# Altium PCB Jinkono Module вер.0.0.PcbDoc (part 1 of 2)
Units mm, origin at the board's own origin, x right, y up, seen from the top; angles counter-clockwise.
Board outline 90 x 80 mm, 2 copper layers (Top Layer, Bottom Layer); 154 components, 381 nets, 2588 pads, 0 vias.
Unrouted connection lines stored in the file: 1285.
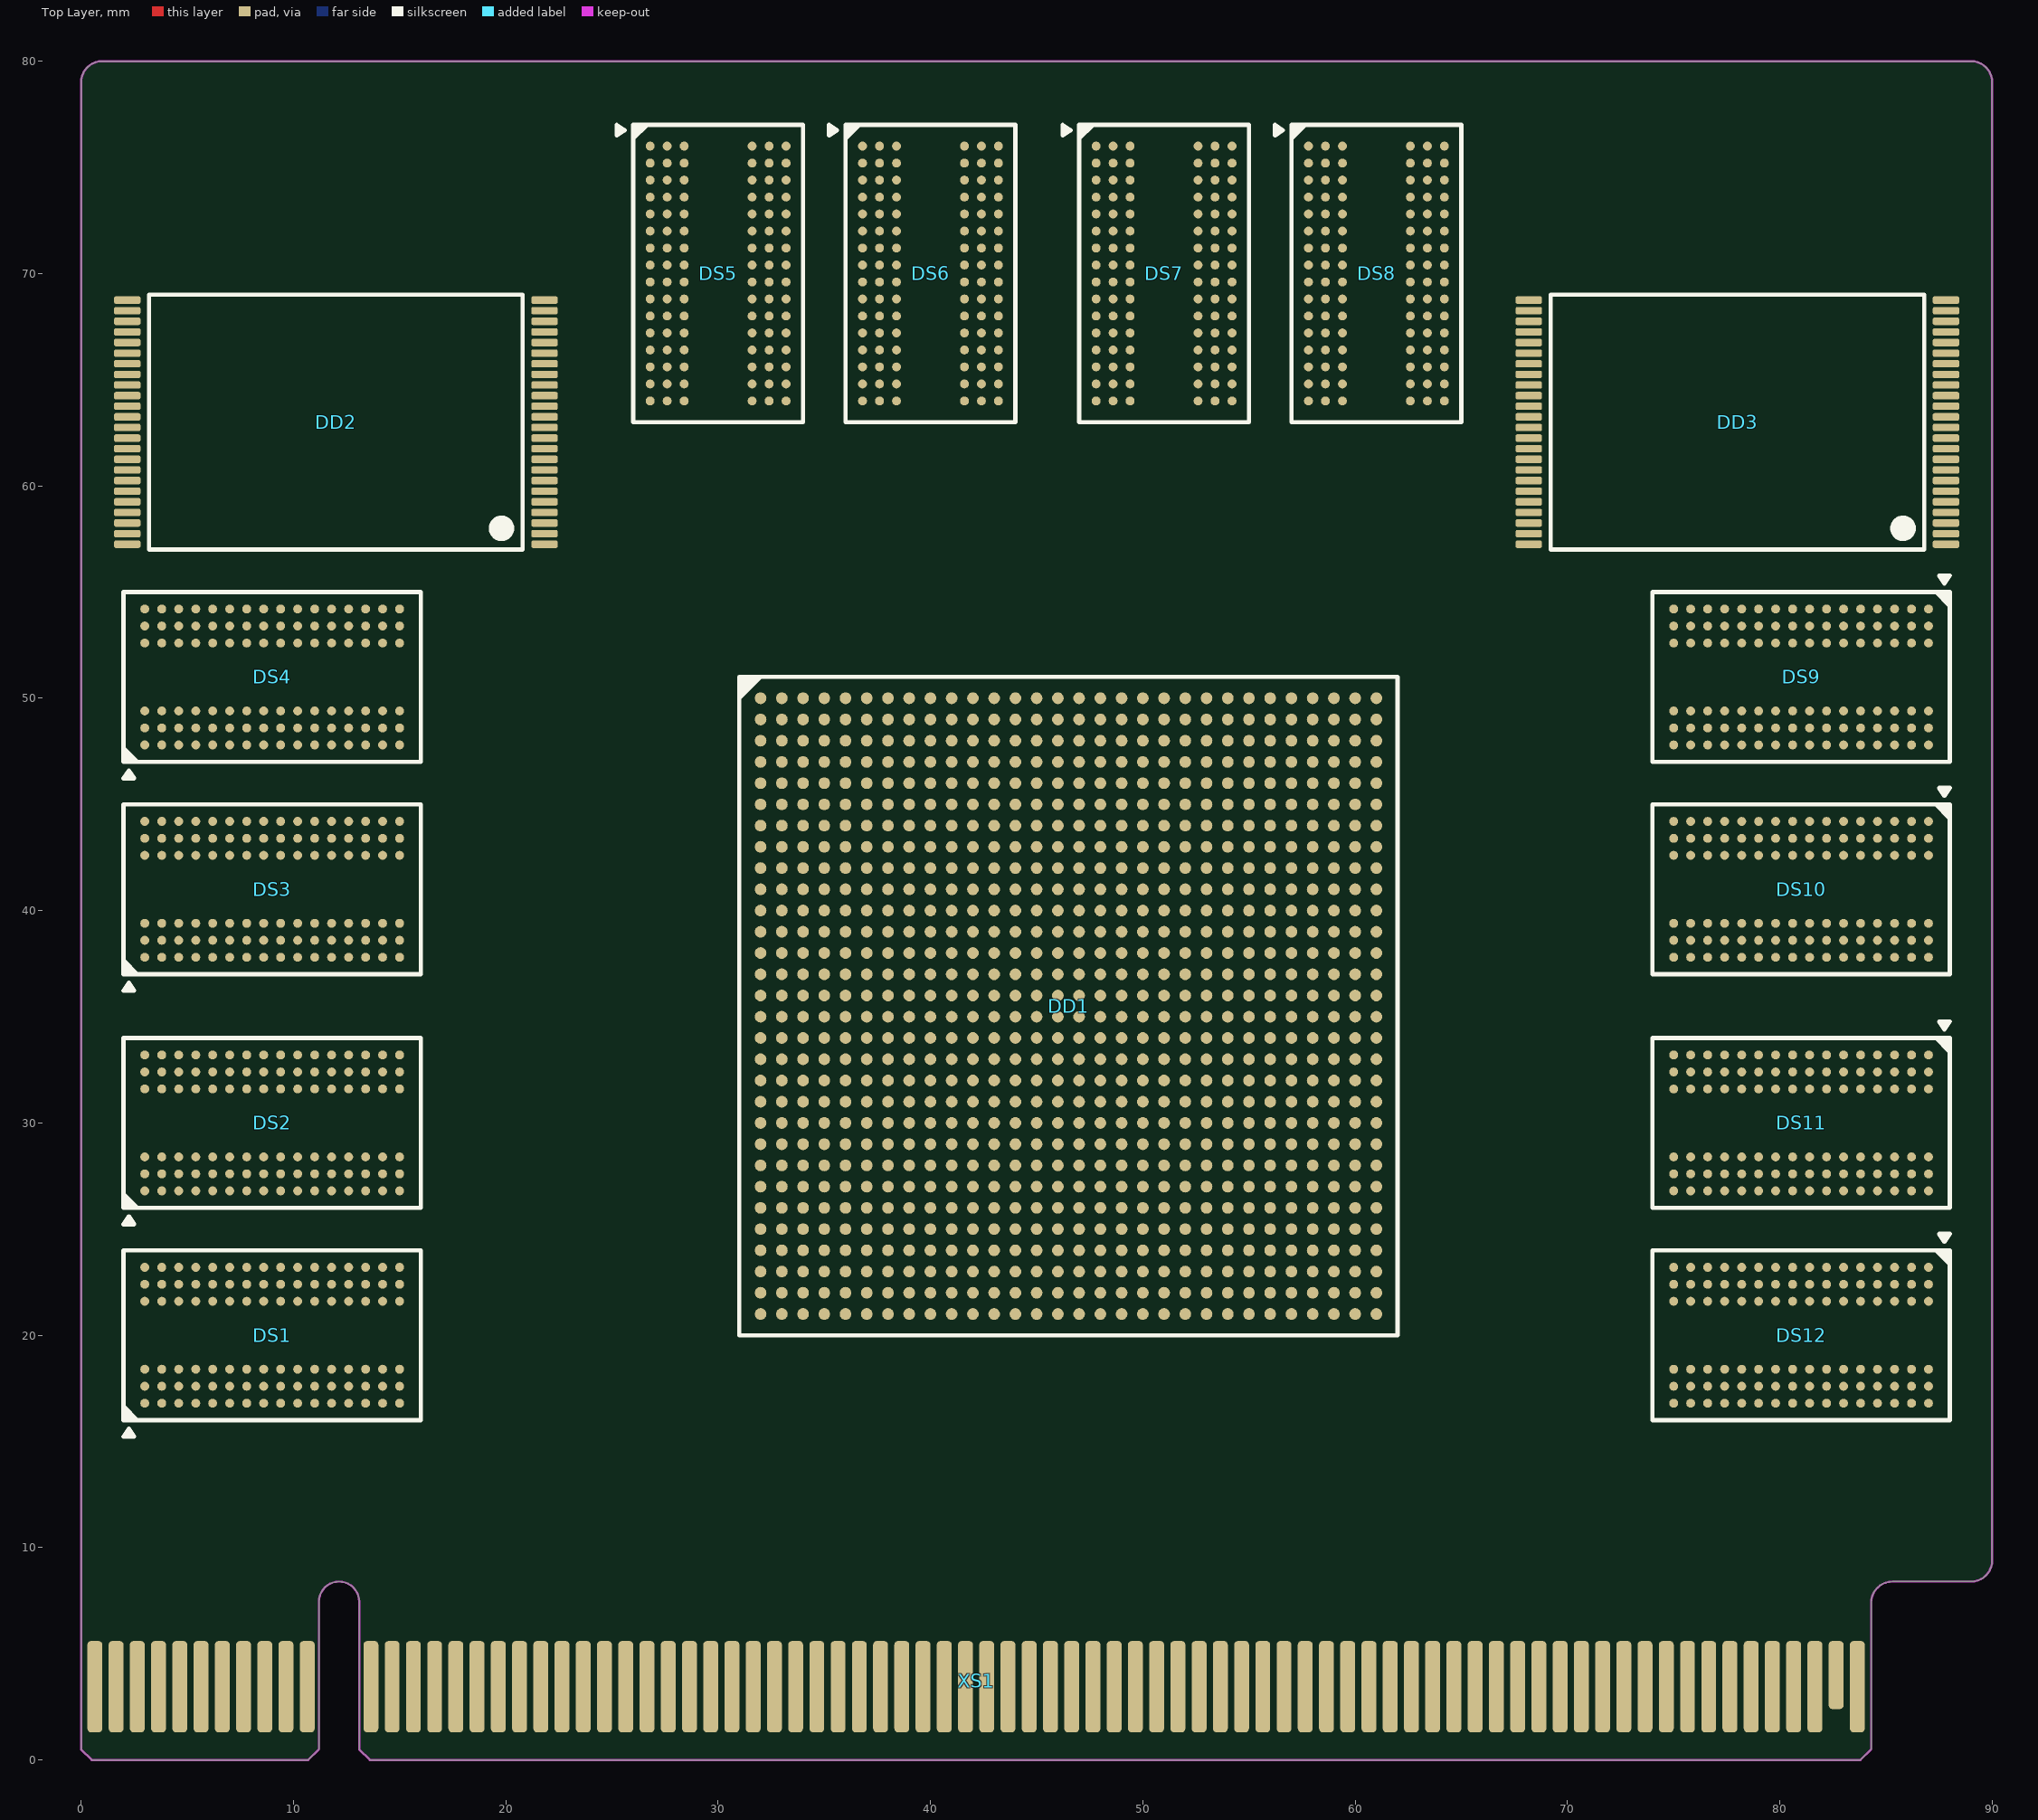
[diagram p0: Top Layer view]
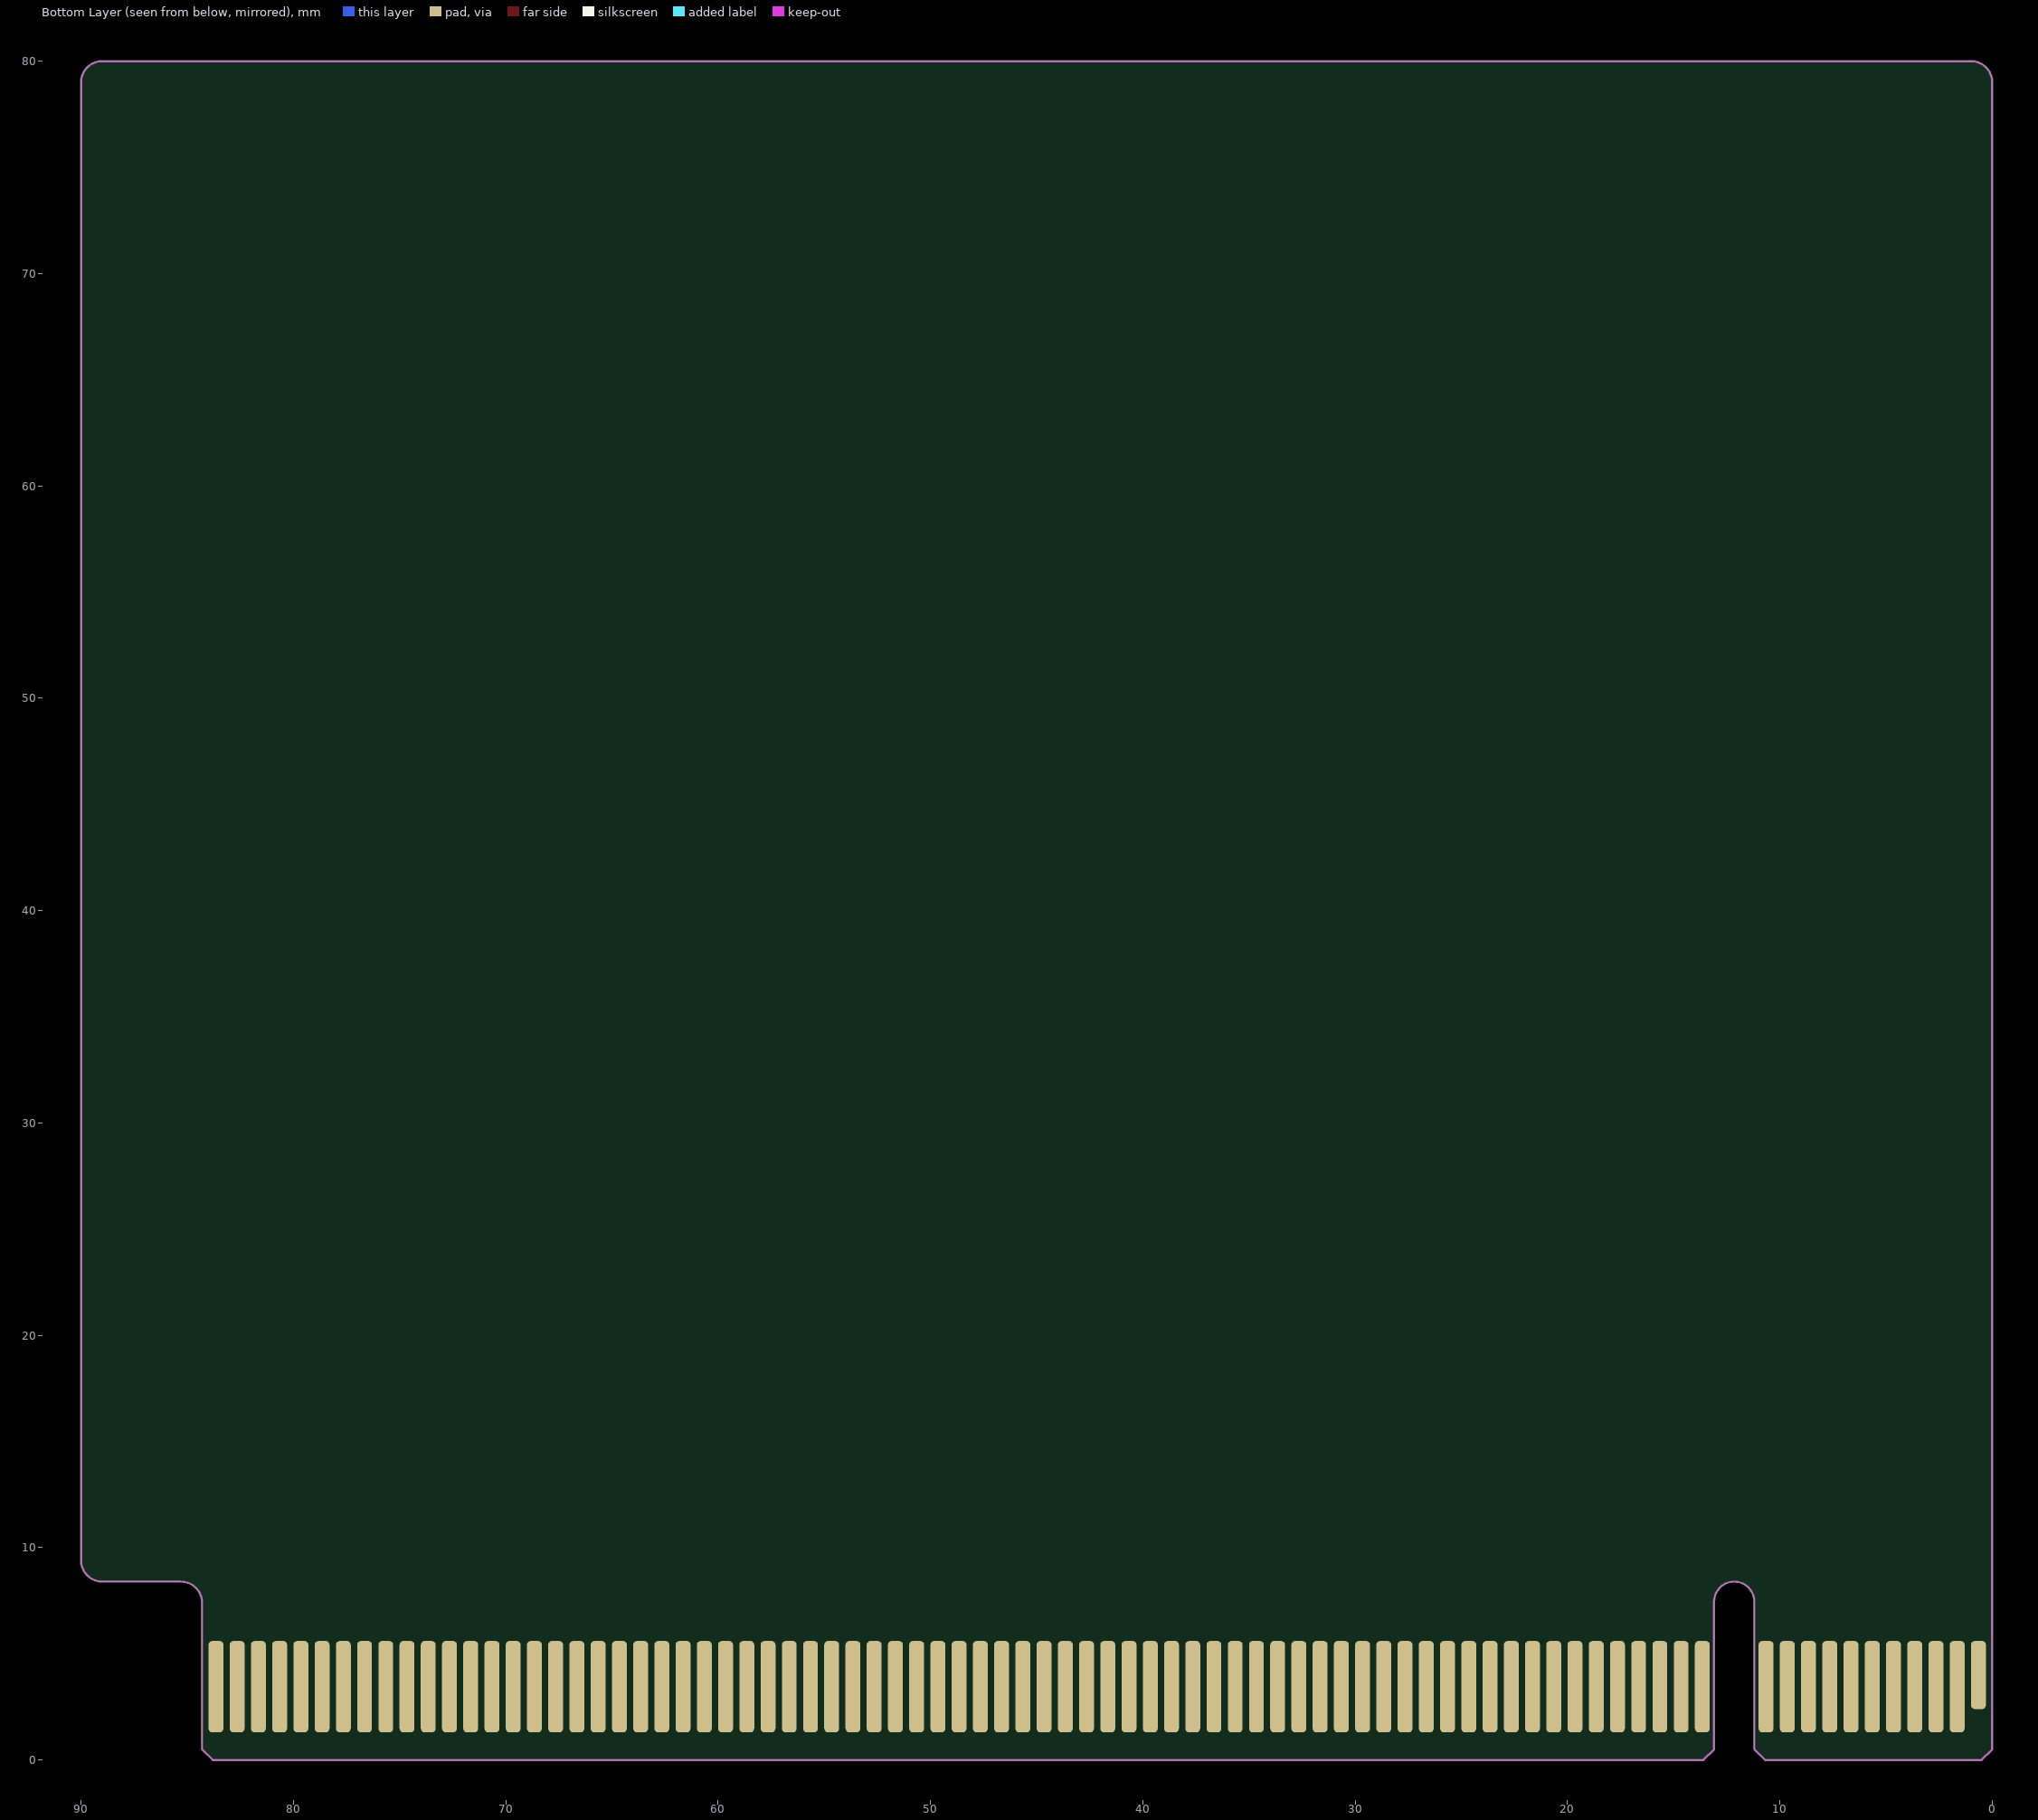
[diagram p1: Bottom Layer view, seen from below]

## Layer stack, top to bottom
Top Solder: solder mask 0.0102, Solder Resist, Dk 3.5
Top Layer: signal copper 0.0356
Dielectric 1: dielectric 0.32, FR-4, Dk 4.8
Bottom Layer: signal copper 0.0356
Bottom Solder: solder mask 0.0102, Solder Resist, Dk 3.5

## Board outline
0,0.5 0.5,0 10.7,0 11.2,0.5 11.2,7.45 cw(c12.15,7.45) 12.15,8.4 cw(c12.15,7.45) 13.1,7.45 13.1,0.5 13.6,0 83.8,0 84.3,0.5 84.3,7.4 cw(c85.3,7.4) 85.3,8.4 89,8.4 ccw(c89,9.4) 90,9.4 90,79 ccw(c89,79) 89,80 1,80 ccw(c1,79) 0,79

## Design rules (kind name [scope] priority, off if disabled: settings)
Clearance [All] p1: gap=0.254 ignorepadtopadclearanceinfootprint=FALSE except(0: Arc-Hole Track-Hole SMDPad-Hole THPad-Hole Via-Hole Fill-Hole Poly-Hole Region-Hole Text-Hole)
PolygonConnect [All] p1: connectstyle=Relief reliefconductorwidth=0.254 reliefentries=4 polygonreliefangle="90 Angle" airgapwidth=0.254
RoutingVias [All] p1: holewidth=0.711 width=1.27 viastyle="Through Hole" minholewidth=0.711 minwidth=1.27 maxholewidth=0.711 maxwidth=1.27
SolderMaskExpansion [All] p1: expansion=0.102 istentingtop=FALSE
Width [All] p1: maxlimit=0.254 minlimit=0.254 preferedwidth=0.254
30 further rules are at their usual default settings.

## Classes and differential pairs
component class Э3-12: DD2 DD3
component class Э3-11: C19 C20 C21 C22 C23 C24 C25 C26 C27 C28 C29 C30 C31 C32 C33 C34 C35 C36 C37 C38 C39 C40 C41 C42 C43 C44 C45 C46 C47 C48 C49 C50 C51 DA? R76 R77 R78 R79 R80 R81 R82 R83 R84 R85 R86 R87
component class Э3-10: C1 C2 C3 C4 C5 C6 C7 C8 C9 C10 C11 C12 C13 C14 C15 C16 C17 C18 R1 R2 R3 R4 R5 R6 R7 R8 R9 R10 R11 R12 R13 R14 R15 R16 R17 R18 R19 R20 R21 R22 R23 R24 R25 R26 R27 R28 R29 R30 R31 R32 R33 R34 R35 R36 R37 R38 R39 R40 R41 R42 R43 R44 R45 R46 R47 R48 R49 R50 R51 R52 R53 R54 R55 R56 R57 R58 R59 R60 R61 R62 R63 R64 R65 R66 R67 R68 R69 R70 R71 R72 R73 R74 R75
component class Э3-9: DS9 DS10 DS11 DS12
component class Э3-8: DS5 DS6 DS7 DS8
component class Э3-7: DS1 DS2 DS3 DS4
component class Э3-2: DD1
component class Э3-1: XS1

## Components (designator, comment, footprint, x,y, rotation, side; value= is the part's Value field where it differs from the comment)
C1 "1" C0201-B-0.3mm 735.001,187 r0 top value="0,1 мкФ"
C2 "1" C0201-B-0.3mm 672.001,187 r0 top value="0,1 мкФ"
C3 "1" C0201-B-0.3mm 609.001,187 r0 top value="0,1 мкФ"
C4 "1" C0201-B-0.3mm 763.001,187 r0 top value="0,1 мкФ"
C5 "1" C0201-B-0.3mm 702.001,187 r0 top value="0,1 мкФ"
C6 "1" C0201-B-0.3mm 639.001,187 r0 top value="0,1 мкФ"
C7 "1" C0201-B-0.3mm 738.001,187 r0 top value="0,1 мкФ"
C8 "1" C0201-B-0.3mm 676.001,187 r0 top value="0,1 мкФ"
C9 "1" C0201-B-0.3mm 613.001,187 r0 top value="0,1 мкФ"
C10 "1" C0201-B-0.3mm 767.001,187 r90 top value="0,1 мкФ"
C11 "1" C0201-B-0.3mm 706.001,187 r90 top value="0,1 мкФ"
C12 "1" C0201-B-0.3mm 643.001,187 r90 top value="0,1 мкФ"
C13 "1" C0201-B-0.3mm 742.001,187 r90 top value="0,1 мкФ"
C14 "1" C0201-B-0.3mm 680.001,187 r90 top value="0,1 мкФ"
C15 "1" C0201-B-0.3mm 617.001,187 r90 top value="0,1 мкФ"
C16 "1" C0201-B-0.3mm 773.001,187 r90 top value="0,1 мкФ"
C17 "1" C0201-B-0.3mm 711.001,187 r90 top value="0,1 мкФ"
C18 "1" C0201-B-0.3mm 649.001,187 r90 top value="0,1 мкФ"
C19 "1" C0805-B-1.25mm-NO 453.001,195 r0 top value="10 мкФ"
C20 "1" C0805-B-1.25mm-NO 365,194 r90 top value="10 мкФ"
C21 "1" C0805-B-1.25mm-NO 279,195 r0 top value="10 мкФ"
C22 "1" C0402-B-0.5mm-NO 492.001,195 r90 top value="0,1 мкФ"
C23 "1" C0402-B-0.5mm-NO 405.001,195 r90 top value="0,1 мкФ"
C24 "1" C0402-B-0.5mm-NO 318,195 r90 top value="0,1 мкФ"
C25 "1" C0805-B-1.25mm-NO 457.001,194 r90 top value="10 мкФ"
C26 "1" C0805-B-1.25mm-NO 371,194 r90 top value="10 мкФ"
C27 "1" C0805-B-1.25mm-NO 284,194 r90 top value="10 мкФ"
C28 "1" C0805-B-1.25mm-NO 498.001,194 r90 top value="10 мкФ"
C29 "1" C0805-B-1.25mm-NO 411.001,194 r90 top value="10 мкФ"
C30 "1" C0805-B-1.25mm-NO 324,194 r90 top value="10 мкФ"
C31 "1" C0402-B-0.5mm-NO 463.001,195 r90 top value="0,1 мкФ"
C32 "1" C0402-B-0.5mm-NO 376,195 r90 top value="0,1 мкФ"
C33 "1" C0402-B-0.5mm-NO 289,195 r90 top value="0,1 мкФ"
C34 "1" C0402-B-0.5mm-NO 486.001,195 r90 top value="0,01 мкФ"
C35 "1" C0402-B-0.5mm-NO 399,195 r90 top value="0,01 мкФ"
C36 "1" C0402-B-0.5mm-NO 312,195 r90 top value="0,01 мкФ"
C37 "1" C0402-B-0.5mm-NO 503.001,195 r90 top value="0,1 мкФ"
C38 "1" C0402-B-0.5mm-NO 416.001,195 r90 top value="0,1 мкФ"
C39 "1" C0402-B-0.5mm-NO 330,195 r90 top value="0,1 мкФ"
C40 "1" C0805-B-1.25mm-NO 474.001,194 r90 top value="10 мкФ"
C41 "1" C0805-B-1.25mm-NO 389,195 r0 top value="10 мкФ"
C42 "1" C0805-B-1.25mm-NO 301,194 r90 top value="10 мкФ"
C43 "1" C0805-B-1.25mm-NO 510.001,194 r90 top value="10 мкФ"
C44 "1" C0805-B-1.25mm-NO 423.001,194 r90 top value="10 мкФ"
C45 "1" C0805-B-1.25mm-NO 336,194 r90 top value="10 мкФ"
C46 "1" C0805-B-1.25mm-NO 480.001,194 r90 top value="10 мкФ"
C47 "1" C0805-B-1.25mm-NO 393,194 r90 top value="10 мкФ"
C48 "1" C0805-B-1.25mm-NO 307,194 r90 top value="10 мкФ"
C49 "1" C0805-B-1.25mm-NO 515.001,194 r90 top value="10 мкФ"
C50 "1" C0805-B-1.25mm-NO 428.001,194 r90 top value="10 мкФ"
C51 "1" C0805-B-1.25mm-NO 343,195 r0 top value="10 мкФ"
DD1 "*" FF900/FFG900 46.5,35.5 r0 top
DD2 "USB2534i-1080AEN" 48-TSOP-1 12,63 r180 top
DD3 "USB2534i-1080AEN" 48-TSOP-1 78,63 r180 top
DS1 "1" 96-FBGA 9,20 r90 top
DS2 "1" 96-FBGA 9,30 r90 top
DS3 "1" 96-FBGA 9,41 r90 top
DS4 "1" 96-FBGA 9,51 r90 top
DS5 "1" 96-FBGA 30,70 r0 top
DS6 "1" 96-FBGA 40,70 r0 top
DS7 "1" 96-FBGA 51,70 r0 top
DS8 "1" 96-FBGA 61,70 r0 top
DS9 "1" 96-FBGA 81,51 r270 top
DS10 "1" 96-FBGA 81,41 r270 top
DS11 "1" 96-FBGA 81,30 r270 top
DS12 "1" 96-FBGA 81,20 r270 top
R1 "1" CR0201-B-0.25mm 748.001,187 r0 top value=40,2
R2 "1" CR0201-B-0.25mm 686.001,187 r0 top value=40,2
R3 "1" CR0201-B-0.25mm 623.001,187 r0 top value=40,2
R4 "1" CR0201-B-0.25mm 576.001,187 r0 top value=40,2
R5 "1" CR0201-B-0.25mm 543.001,187 r0 top value=40,2
R6 "1" CR0201-B-0.25mm 510.001,187 r0 top value=40,2
R7 "1" CR0201-B-0.25mm 477.001,187 r0 top value=40,2
R8 "1" CR0201-B-0.25mm 443.001,187 r0 top value=40,2
R9 "1" CR0201-B-0.25mm 411.001,187 r0 top value=40,2
R10 "1" CR0201-B-0.25mm 376,187 r90 top value=40,2
R11 "1" CR0201-B-0.25mm 342,187 r90 top value=40,2
R12 "1" CR0201-B-0.25mm 307,187 r90 top value=49,9
R13 "1" CR0201-B-0.25mm 272,187 r90 top value=80,6
R14 "1" CR0201-B-0.25mm 717.001,187 r90 top value=40,2
R15 "1" CR0201-B-0.25mm 654.001,187 r90 top value=40,2
R16 "1" CR0201-B-0.25mm 592.001,187 r90 top value=40,2
R17 "1" CR0201-B-0.25mm 559.001,187 r90 top value=40,2
R18 "1" CR0201-B-0.25mm 525.001,187 r90 top value=40,2
R19 "1" CR0201-B-0.25mm 493.001,187 r90 top value=40,2
R20 "1" CR0201-B-0.25mm 459.001,187 r90 top value=40,2
R21 "1" CR0201-B-0.25mm 426.001,187 r90 top value=40,2
R22 "1" CR0201-B-0.25mm 393,187 r90 top value=40,2
R23 "1" CR0201-B-0.25mm 358,187 r90 top value=40,2
R24 "1" CR0201-B-0.25mm 324,187 r90 top value=40,2
R25 "1" CR0201-B-0.25mm 289,187 r90 top value=40,2
R26 "1" CR0201-B-0.25mm 752.001,187 r90 top value=40,2
R27 "1" CR0201-B-0.25mm 690.001,187 r90 top value=40,2
R28 "1" CR0201-B-0.25mm 627.001,187 r90 top value=40,2
R29 "1" CR0201-B-0.25mm 580.001,187 r90 top value=40,2
R30 "1" CR0201-B-0.25mm 547.001,187 r90 top value=40,2
R31 "1" CR0201-B-0.25mm 514.001,187 r90 top value=40,2
R32 "1" CR0201-B-0.25mm 481.001,187 r90 top value=40,2
R33 "1" CR0201-B-0.25mm 447.001,187 r90 top value=40,2
R34 "1" CR0201-B-0.25mm 415.001,187 r90 top value=40,2
R35 "1" CR0201-B-0.25mm 381,187 r90 top value=40,2
R36 "1" CR0201-B-0.25mm 347,187 r90 top value=40,2
R37 "1" CR0201-B-0.25mm 313,187 r90 top value=49,9
R38 "1" CR0201-B-0.25mm 278,187 r90 top value=80,6
R39 "1" CR0201-B-0.25mm 723.001,187 r90 top value=40,2
R40 "1" CR0201-B-0.25mm 660.001,187 r90 top value=40,2
R41 "1" CR0201-B-0.25mm 598.001,187 r90 top value=40,2
R42 "1" CR0201-B-0.25mm 564.001,187 r90 top value=40,2
R43 "1" CR0201-B-0.25mm 531.001,187 r90 top value=40,2
R44 "1" CR0201-B-0.25mm 498.001,187 r90 top value=40,2
R45 "1" CR0201-B-0.25mm 465.001,187 r90 top value=40,2
R46 "1" CR0201-B-0.25mm 432.001,187 r90 top value=40,2
R47 "1" CR0201-B-0.25mm 399,187 r90 top value=40,2
R48 "1" CR0201-B-0.25mm 364,187 r90 top value=40,2
R49 "1" CR0201-B-0.25mm 330,187 r90 top value=40,2
R50 "1" CR0201-B-0.25mm 295,187 r90 top value=40,2
R51 "1" CR0201-B-0.25mm 758.001,187 r90 top value=40,2
R52 "1" CR0201-B-0.25mm 696.001,187 r90 top value=40,2
R53 "1" CR0201-B-0.25mm 633.001,187 r90 top value=40,2
R54 "1" CR0201-B-0.25mm 586.001,187 r90 top value=40,2
R55 "1" CR0201-B-0.25mm 553.001,187 r90 top value=40,2
R56 "1" CR0201-B-0.25mm 520.001,187 r90 top value=40,2
R57 "1" CR0201-B-0.25mm 487.001,187 r90 top value=40,2
R58 "1" CR0201-B-0.25mm 453.001,187 r90 top value=40,2
R59 "1" CR0201-B-0.25mm 421.001,187 r90 top value=40,2
R60 "1" CR0201-B-0.25mm 387,187 r90 top value=40,2
R61 "1" CR0201-B-0.25mm 353,187 r90 top value=40,2
R62 "1" CR0201-B-0.25mm 318,187 r90 top value=49,9
R63 "1" CR0201-B-0.25mm 284,187 r90 top value=80,6
R64 "1" CR0201-B-0.25mm 728.001,187 r90 top value=40,2
R65 "1" CR0201-B-0.25mm 666.001,187 r90 top value=40,2
R66 "1" CR0201-B-0.25mm 603.001,187 r90 top value=40,2
R67 "1" CR0201-B-0.25mm 570.001,187 r90 top value=40,2
R68 "1" CR0201-B-0.25mm 537.001,187 r90 top value=40,2
R69 "1" CR0201-B-0.25mm 504.001,187 r90 top value=40,2
R70 "1" CR0201-B-0.25mm 471.001,187 r90 top value=40,2
R71 "1" CR0201-B-0.25mm 438.001,187 r90 top value=40,2
R72 "1" CR0201-B-0.25mm 405.001,187 r90 top value=40,2
R73 "1" CR0201-B-0.25mm 370,187 r90 top value=40,2
R74 "1" CR0201-B-0.25mm 336,187 r90 top value=40,2
R75 "1" CR0201-B-0.25mm 301,187 r90 top value=40,2
R76 "1" CR0402-B-0.35mm-NO 521.001,195 r90 top value="10 кОм"
R77 "1" CR0402-B-0.35mm-NO 434.001,195 r90 top value="10 кОм"
R78 "1" CR0402-B-0.35mm-NO 347,195 r90 top value="10 кОм"
R79 "1" CR0402-B-0.35mm-NO 468.001,195 r90 top value="10 кОм"
R80 "1" CR0402-B-0.35mm-NO 382,195 r90 top value="10 кОм"
R81 "1" CR0402-B-0.35mm-NO 295,195 r90 top value="10 кОм"
R82 "1" CR0402-B-0.35mm-NO 527.001,195 r90 top value="47 кОм"
R83 "1" CR0402-B-0.35mm-NO 440.001,195 r90 top value="47 кОм"
R84 "1" CR0402-B-0.35mm-NO 353,195 r90 top value="47 кОм"
R85 "1" CR0402-B-0.35mm-NO 446.001,195 r90 top value="47 кОм"
R86 "1" CR0402-B-0.35mm-NO 358,195 r90 top value="47 кОм"
R87 "1" CR0402-B-0.35mm-NO 272,195 r90 top value="47 кОм"
XS1 "1" "PCIe x16 Board Edge Connector" 0,0 r0 top

## Footprints (in the part's own frame and the unit in brackets; to place one, negate y for a bottom-side part, rotate by r counter-clockwise, add the part's x,y. Pads: shape width x height; smd on the part's side, far side on the other; paste and mask are expansions set on the pad)
48-TSOP-1 [mm] "48-Pin TSOP – Type 1 CPL Micron"
  rrect50% 1.25x0.35 smd: 1(-9.825,5.75) 2(-9.825,5.25) 3(-9.825,4.75) 4(-9.825,4.25) 5(-9.825,3.75) 6(-9.825,3.25) 7(-9.825,2.75) 8(-9.825,2.25) 9(-9.825,1.75) 10(-9.825,1.25) 11(-9.825,0.75) 12(-9.825,0.25) 13(-9.825,-0.25) 14(-9.825,-0.75) 15(-9.825,-1.25) 16(-9.825,-1.75) 17(-9.825,-2.25) 18(-9.825,-2.75) 19(-9.825,-3.25) 20(-9.825,-3.75) 21(-9.825,-4.25) 22(-9.825,-4.75) 23(-9.825,-5.25) 24(-9.825,-5.75) 25(9.825,-5.75) 26(9.825,-5.25) 27(9.825,-4.75) 28(9.825,-4.25) 29(9.825,-3.75) 30(9.825,-3.25) 31(9.825,-2.75) 32(9.825,-2.25) 33(9.825,-1.75) 34(9.825,-1.25) 35(9.825,-0.75) 36(9.825,-0.25) 37(9.825,0.25) 38(9.825,0.75) 39(9.825,1.25) 40(9.825,1.75) 41(9.825,2.25) 42(9.825,2.75) 43(9.825,3.25) 44(9.825,3.75) 45(9.825,4.25) 46(9.825,4.75) 47(9.825,5.25) 48(9.825,5.75)
  silkscreen extent -8.8,-6 8.8,6, body extent -10,-6 10,6, height 1.2
96-FBGA [mm] "BGA 8x14x1,2mm, Pitch 0,80mm"
  round 0.42 smd mask+0.05: A1(-3.2,6) A2(-2.4,6) A3(-1.6,6) A7(1.6,6) A8(2.4,6) A9(3.2,6) B1(-3.2,5.2) B2(-2.4,5.2) B3(-1.6,5.2) B7(1.6,5.2) B8(2.4,5.2) B9(3.2,5.2) C1(-3.2,4.4) C2(-2.4,4.4) C3(-1.6,4.4) C7(1.6,4.4) C8(2.4,4.4) C9(3.2,4.4) D1(-3.2,3.6) D2(-2.4,3.6) D3(-1.6,3.6) D7(1.6,3.6) D8(2.4,3.6) D9(3.2,3.6) E1(-3.2,2.8) E2(-2.4,2.8) E3(-1.6,2.8) E7(1.6,2.8) E8(2.4,2.8) E9(3.2,2.8) F1(-3.2,2) F2(-2.4,2) F3(-1.6,2) F7(1.6,2) F8(2.4,2) F9(3.2,2) G1(-3.2,1.2) G2(-2.4,1.2) G3(-1.6,1.2) G7(1.6,1.2) G8(2.4,1.2) G9(3.2,1.2) H1(-3.2,0.4) H2(-2.4,0.4) H3(-1.6,0.4) H7(1.6,0.4) H8(2.4,0.4) H9(3.2,0.4) J1(-3.2,-0.4) J2(-2.4,-0.4) J3(-1.6,-0.4) J7(1.6,-0.4) J8(2.4,-0.4) J9(3.2,-0.4) K1(-3.2,-1.2) K2(-2.4,-1.2) K3(-1.6,-1.2) K7(1.6,-1.2) K8(2.4,-1.2) K9(3.2,-1.2) L1(-3.2,-2) L2(-2.4,-2) L3(-1.6,-2) L7(1.6,-2) L8(2.4,-2) L9(3.2,-2) M1(-3.2,-2.8) M2(-2.4,-2.8) M3(-1.6,-2.8) M7(1.6,-2.8) M8(2.4,-2.8) M9(3.2,-2.8) N1(-3.2,-3.6) N2(-2.4,-3.6) N3(-1.6,-3.6) N7(1.6,-3.6) N8(2.4,-3.6) N9(3.2,-3.6) P1(-3.2,-4.4) P2(-2.4,-4.4) P3(-1.6,-4.4) P7(1.6,-4.4) P8(2.4,-4.4) P9(3.2,-4.4) R1(-3.2,-5.2) R2(-2.4,-5.2) R3(-1.6,-5.2) R7(1.6,-5.2) R8(2.4,-5.2) R9(3.2,-5.2) T1(-3.2,-6) T2(-2.4,-6) T3(-1.6,-6) T7(1.6,-6) T8(2.4,-6) T9(3.2,-6)
  silkscreen extent -4.78,-7 4,7, body extent -4,-7 4,7, height 1.2
C0201-B-0.3mm [mm] "MURATA Footprint"
  rrect25% 0.3x0.3 smd mask+0.05: 1(-0.275,0) 2(0.275,0)
  silkscreen extent -0.6,-0.33 0.6,0.33, body extent -0.3,-0.15 0.3,0.15, height 0.3
C0402-B-0.5mm-NO [mm] "MURATA Footprint No Overlay"
  rrect25% 0.4x0.5 smd mask+0.05: 1(-0.4,0) 2(0.4,0)
  body extent -0.5,-0.25 0.5,0.25, height 0.5
C0805-B-1.25mm-NO [mm] "MURATA Footprint No Overlay"
  rrect25% 0.75x1.25 smd: 1(-0.975,0) 2(0.975,0)
  body extent -1,-0.63 1,0.63, height 1.25
CR0201-B-0.25mm [mm] "BOURNS Footprint"
  rrect25% 0.28x0.3 smd mask+0.05: 1(-0.265,0) 2(0.265,0)
  silkscreen extent -0.58,-0.33 0.58,0.33, body extent -0.3,-0.15 0.3,0.15, height 0.26
CR0402-B-0.35mm-NO [mm] "BOURNS Footprint No Overlay"
  rrect25% 0.35x0.5 smd mask+0.05: 1(-0.425,0) 2(0.425,0)
  body extent -0.5,-0.25 0.5,0.25, height 0.37
FF900/FFG900 [mm]
  round 0.55 smd: A1(-14.5,14.5) A2(-13.5,14.5) A3(-12.5,14.5) A4(-11.5,14.5) A5(-10.5,14.5) A6(-9.5,14.5) A7(-8.5,14.5) A8(-7.5,14.5) A9(-6.5,14.5) A10(-5.5,14.5) A11(-4.5,14.5) A12(-3.5,14.5) A13(-2.5,14.5) A14(-1.5,14.5) A15(-0.5,14.5) A16(0.5,14.5) A17(1.5,14.5) A18(2.5,14.5) A19(3.5,14.5) A20(4.5,14.5) A21(5.5,14.5) A22(6.5,14.5) A23(7.5,14.5) A24(8.5,14.5) A25(9.5,14.5) A26(10.5,14.5) A27(11.5,14.5) A28(12.5,14.5) A29(13.5,14.5) A30(14.5,14.5) AA1(-14.5,-5.5) AA2(-13.5,-5.5) AA3(-12.5,-5.5) AA4(-11.5,-5.5) AA5(-10.5,-5.5) AA6(-9.5,-5.5) AA7(-8.5,-5.5) AA8(-7.5,-5.5) AA9(-6.5,-5.5) AA10(-5.5,-5.5) AA11(-4.5,-5.5) AA12(-3.5,-5.5) AA13(-2.5,-5.5) AA14(-1.5,-5.5) AA15(-0.5,-5.5) AA16(0.5,-5.5) AA17(1.5,-5.5) AA18(2.5,-5.5) AA19(3.5,-5.5) AA20(4.5,-5.5) AA21(5.5,-5.5) AA22(6.5,-5.5) AA23(7.5,-5.5) AA24(8.5,-5.5) AA25(9.5,-5.5) AA26(10.5,-5.5) AA27(11.5,-5.5) AA28(12.5,-5.5) AA29(13.5,-5.5) AA30(14.5,-5.5) AB1(-14.5,-6.5) AB2(-13.5,-6.5) AB3(-12.5,-6.5) AB4(-11.5,-6.5) AB5(-10.5,-6.5) AB6(-9.5,-6.5) AB7(-8.5,-6.5) AB8(-7.5,-6.5) AB9(-6.5,-6.5) AB10(-5.5,-6.5) AB11(-4.5,-6.5) AB12(-3.5,-6.5) AB13(-2.5,-6.5) AB14(-1.5,-6.5) AB15(-0.5,-6.5) AB16(0.5,-6.5) AB17(1.5,-6.5) AB18(2.5,-6.5) AB19(3.5,-6.5) AB20(4.5,-6.5) AB21(5.5,-6.5) AB22(6.5,-6.5) AB23(7.5,-6.5) AB24(8.5,-6.5) AB25(9.5,-6.5) AB26(10.5,-6.5) AB27(11.5,-6.5) AB28(12.5,-6.5) AB29(13.5,-6.5) AB30(14.5,-6.5) AC1(-14.5,-7.5) AC2(-13.5,-7.5) AC3(-12.5,-7.5) AC4(-11.5,-7.5) AC5(-10.5,-7.5) AC6(-9.5,-7.5) AC7(-8.5,-7.5) AC8(-7.5,-7.5) AC9(-6.5,-7.5) AC10(-5.5,-7.5) AC11(-4.5,-7.5) AC12(-3.5,-7.5) AC13(-2.5,-7.5) AC14(-1.5,-7.5) AC15(-0.5,-7.5) AC16(0.5,-7.5) AC17(1.5,-7.5) AC18(2.5,-7.5) AC19(3.5,-7.5) AC20(4.5,-7.5) AC21(5.5,-7.5) AC22(6.5,-7.5) AC23(7.5,-7.5) AC24(8.5,-7.5) AC25(9.5,-7.5) AC26(10.5,-7.5) AC27(11.5,-7.5) AC28(12.5,-7.5) AC29(13.5,-7.5) AC30(14.5,-7.5) AD1(-14.5,-8.5) AD2(-13.5,-8.5) AD3(-12.5,-8.5) AD4(-11.5,-8.5) AD5(-10.5,-8.5) AD6(-9.5,-8.5) AD7(-8.5,-8.5) AD8(-7.5,-8.5) AD9(-6.5,-8.5) AD10(-5.5,-8.5) AD11(-4.5,-8.5) AD12(-3.5,-8.5) AD13(-2.5,-8.5) AD14(-1.5,-8.5) AD15(-0.5,-8.5) AD16(0.5,-8.5) AD17(1.5,-8.5) AD18(2.5,-8.5) AD19(3.5,-8.5) AD20(4.5,-8.5) AD21(5.5,-8.5) AD22(6.5,-8.5) AD23(7.5,-8.5) AD24(8.5,-8.5) AD25(9.5,-8.5) AD26(10.5,-8.5) AD27(11.5,-8.5) AD28(12.5,-8.5) AD29(13.5,-8.5) AD30(14.5,-8.5) AE1(-14.5,-9.5) AE2(-13.5,-9.5) AE3(-12.5,-9.5) AE4(-11.5,-9.5) AE5(-10.5,-9.5) AE6(-9.5,-9.5) AE7(-8.5,-9.5) AE8(-7.5,-9.5) AE9(-6.5,-9.5) AE10(-5.5,-9.5) AE11(-4.5,-9.5) AE12(-3.5,-9.5) AE13(-2.5,-9.5) AE14(-1.5,-9.5) AE15(-0.5,-9.5) AE16(0.5,-9.5) AE17(1.5,-9.5) AE18(2.5,-9.5) AE19(3.5,-9.5) AE20(4.5,-9.5) AE21(5.5,-9.5) AE22(6.5,-9.5) AE23(7.5,-9.5) AE24(8.5,-9.5) AE25(9.5,-9.5) AE26(10.5,-9.5) AE27(11.5,-9.5) AE28(12.5,-9.5) AE29(13.5,-9.5) AE30(14.5,-9.5) AF1(-14.5,-10.5) AF2(-13.5,-10.5) AF3(-12.5,-10.5) AF4(-11.5,-10.5) AF5(-10.5,-10.5) AF6(-9.5,-10.5) AF7(-8.5,-10.5) AF8(-7.5,-10.5) AF9(-6.5,-10.5) AF10(-5.5,-10.5) AF11(-4.5,-10.5) AF12(-3.5,-10.5) AF13(-2.5,-10.5) AF14(-1.5,-10.5) AF15(-0.5,-10.5) AF16(0.5,-10.5) AF17(1.5,-10.5) AF18(2.5,-10.5) AF19(3.5,-10.5) AF20(4.5,-10.5) AF21(5.5,-10.5) AF22(6.5,-10.5) AF23(7.5,-10.5) AF24(8.5,-10.5) AF25(9.5,-10.5) AF26(10.5,-10.5) AF27(11.5,-10.5) AF28(12.5,-10.5) AF29(13.5,-10.5) AF30(14.5,-10.5) AG1(-14.5,-11.5) AG2(-13.5,-11.5) AG3(-12.5,-11.5) AG4(-11.5,-11.5) AG5(-10.5,-11.5) AG6(-9.5,-11.5) AG7(-8.5,-11.5) AG8(-7.5,-11.5) AG9(-6.5,-11.5) AG10(-5.5,-11.5) AG11(-4.5,-11.5) AG12(-3.5,-11.5) AG13(-2.5,-11.5) AG14(-1.5,-11.5) AG15(-0.5,-11.5) AG16(0.5,-11.5) AG17(1.5,-11.5) AG18(2.5,-11.5) AG19(3.5,-11.5) AG20(4.5,-11.5) AG21(5.5,-11.5) AG22(6.5,-11.5) AG23(7.5,-11.5) AG24(8.5,-11.5) AG25(9.5,-11.5) AG26(10.5,-11.5) AG27(11.5,-11.5) AG28(12.5,-11.5) AG29(13.5,-11.5) AG30(14.5,-11.5) AH1(-14.5,-12.5) AH2(-13.5,-12.5) AH3(-12.5,-12.5) AH4(-11.5,-12.5) AH5(-10.5,-12.5) AH6(-9.5,-12.5) AH7(-8.5,-12.5) AH8(-7.5,-12.5) AH9(-6.5,-12.5) AH10(-5.5,-12.5) AH11(-4.5,-12.5) AH12(-3.5,-12.5) AH13(-2.5,-12.5) AH14(-1.5,-12.5) AH15(-0.5,-12.5) AH16(0.5,-12.5) AH17(1.5,-12.5) AH18(2.5,-12.5) AH19(3.5,-12.5) AH20(4.5,-12.5) AH21(5.5,-12.5) AH22(6.5,-12.5) AH23(7.5,-12.5) AH24(8.5,-12.5) AH25(9.5,-12.5) AH26(10.5,-12.5) AH27(11.5,-12.5) AH28(12.5,-12.5) AH29(13.5,-12.5) AH30(14.5,-12.5) AJ1(-14.5,-13.5) AJ2(-13.5,-13.5) AJ3(-12.5,-13.5) AJ4(-11.5,-13.5) AJ5(-10.5,-13.5) AJ6(-9.5,-13.5) AJ7(-8.5,-13.5) AJ8(-7.5,-13.5) AJ9(-6.5,-13.5) AJ10(-5.5,-13.5) AJ11(-4.5,-13.5) AJ12(-3.5,-13.5) AJ13(-2.5,-13.5) AJ14(-1.5,-13.5) AJ15(-0.5,-13.5) AJ16(0.5,-13.5) AJ17(1.5,-13.5) AJ18(2.5,-13.5) AJ19(3.5,-13.5) AJ20(4.5,-13.5) AJ21(5.5,-13.5) AJ22(6.5,-13.5) AJ23(7.5,-13.5) AJ24(8.5,-13.5) AJ25(9.5,-13.5) AJ26(10.5,-13.5) AJ27(11.5,-13.5) AJ28(12.5,-13.5) AJ29(13.5,-13.5) AJ30(14.5,-13.5) AK1(-14.5,-14.5) AK2(-13.5,-14.5) AK3(-12.5,-14.5) AK4(-11.5,-14.5) AK5(-10.5,-14.5) AK6(-9.5,-14.5) AK7(-8.5,-14.5) AK8(-7.5,-14.5) AK9(-6.5,-14.5) AK10(-5.5,-14.5) AK11(-4.5,-14.5) AK12(-3.5,-14.5) AK13(-2.5,-14.5) AK14(-1.5,-14.5) AK15(-0.5,-14.5) AK16(0.5,-14.5) AK17(1.5,-14.5) AK18(2.5,-14.5) AK19(3.5,-14.5) AK20(4.5,-14.5) AK21(5.5,-14.5) AK22(6.5,-14.5) AK23(7.5,-14.5) AK24(8.5,-14.5) AK25(9.5,-14.5) AK26(10.5,-14.5) AK27(11.5,-14.5) AK28(12.5,-14.5) AK29(13.5,-14.5) AK30(14.5,-14.5) B1(-14.5,13.5) B2(-13.5,13.5) B3(-12.5,13.5) B4(-11.5,13.5) B5(-10.5,13.5) B6(-9.5,13.5) B7(-8.5,13.5) B8(-7.5,13.5) B9(-6.5,13.5) B10(-5.5,13.5) B11(-4.5,13.5) B12(-3.5,13.5) B13(-2.5,13.5) B14(-1.5,13.5) B15(-0.5,13.5) B16(0.5,13.5) B17(1.5,13.5) B18(2.5,13.5) B19(3.5,13.5) B20(4.5,13.5) B21(5.5,13.5) B22(6.5,13.5) B23(7.5,13.5) B24(8.5,13.5) B25(9.5,13.5) B26(10.5,13.5) B27(11.5,13.5) B28(12.5,13.5) B29(13.5,13.5) B30(14.5,13.5) C1(-14.5,12.5) C2(-13.5,12.5) C3(-12.5,12.5) C4(-11.5,12.5) C5(-10.5,12.5) C6(-9.5,12.5) C7(-8.5,12.5) C8(-7.5,12.5) C9(-6.5,12.5) C10(-5.5,12.5) C11(-4.5,12.5) C12(-3.5,12.5) C13(-2.5,12.5) C14(-1.5,12.5) C15(-0.5,12.5) C16(0.5,12.5) C17(1.5,12.5) C18(2.5,12.5) C19(3.5,12.5) C20(4.5,12.5) C21(5.5,12.5) C22(6.5,12.5) C23(7.5,12.5) C24(8.5,12.5) C25(9.5,12.5) C26(10.5,12.5) C27(11.5,12.5) C28(12.5,12.5) C29(13.5,12.5) C30(14.5,12.5) D1(-14.5,11.5) D2(-13.5,11.5) D3(-12.5,11.5) D4(-11.5,11.5) D5(-10.5,11.5) D6(-9.5,11.5) D7(-8.5,11.5) D8(-7.5,11.5) D9(-6.5,11.5) D10(-5.5,11.5) D11(-4.5,11.5) D12(-3.5,11.5) D13(-2.5,11.5) D14(-1.5,11.5) D15(-0.5,11.5) D16(0.5,11.5) D17(1.5,11.5) D18(2.5,11.5) D19(3.5,11.5) D20(4.5,11.5) D21(5.5,11.5) D22(6.5,11.5) D23(7.5,11.5) D24(8.5,11.5) D25(9.5,11.5) D26(10.5,11.5) D27(11.5,11.5) D28(12.5,11.5) D29(13.5,11.5) D30(14.5,11.5) E1(-14.5,10.5) E2(-13.5,10.5) E3(-12.5,10.5) E4(-11.5,10.5) E5(-10.5,10.5) E6(-9.5,10.5) E7(-8.5,10.5) E8(-7.5,10.5) E9(-6.5,10.5) E10(-5.5,10.5) E11(-4.5,10.5) E12(-3.5,10.5) E13(-2.5,10.5) E14(-1.5,10.5) E15(-0.5,10.5) E16(0.5,10.5) E17(1.5,10.5) E18(2.5,10.5) E19(3.5,10.5) E20(4.5,10.5) E21(5.5,10.5) E22(6.5,10.5) E23(7.5,10.5) E24(8.5,10.5) E25(9.5,10.5) E26(10.5,10.5) E27(11.5,10.5) E28(12.5,10.5) E29(13.5,10.5) E30(14.5,10.5) F1(-14.5,9.5) F2(-13.5,9.5) F3(-12.5,9.5) F4(-11.5,9.5) F5(-10.5,9.5) F6(-9.5,9.5) F7(-8.5,9.5) F8(-7.5,9.5) F9(-6.5,9.5) F10(-5.5,9.5) F11(-4.5,9.5) F12(-3.5,9.5) F13(-2.5,9.5) F14(-1.5,9.5) F15(-0.5,9.5) F16(0.5,9.5) F17(1.5,9.5) F18(2.5,9.5) F19(3.5,9.5) F20(4.5,9.5) F21(5.5,9.5) F22(6.5,9.5) F23(7.5,9.5) F24(8.5,9.5) F25(9.5,9.5) F26(10.5,9.5) F27(11.5,9.5) F28(12.5,9.5) F29(13.5,9.5) F30(14.5,9.5) G1(-14.5,8.5) G2(-13.5,8.5) G3(-12.5,8.5) G4(-11.5,8.5) G5(-10.5,8.5) G6(-9.5,8.5) G7(-8.5,8.5) G8(-7.5,8.5) G9(-6.5,8.5) G10(-5.5,8.5) G11(-4.5,8.5) G12(-3.5,8.5) G13(-2.5,8.5) G14(-1.5,8.5) G15(-0.5,8.5) G16(0.5,8.5) G17(1.5,8.5) G18(2.5,8.5) G19(3.5,8.5) G20(4.5,8.5) G21(5.5,8.5) G22(6.5,8.5) G23(7.5,8.5) G24(8.5,8.5) G25(9.5,8.5) G26(10.5,8.5) G27(11.5,8.5) G28(12.5,8.5) G29(13.5,8.5) G30(14.5,8.5) H1(-14.5,7.5) H2(-13.5,7.5) H3(-12.5,7.5) H4(-11.5,7.5) H5(-10.5,7.5) H6(-9.5,7.5) H7(-8.5,7.5) H8(-7.5,7.5) H9(-6.5,7.5) H10(-5.5,7.5) H11(-4.5,7.5) H12(-3.5,7.5) H13(-2.5,7.5) H14(-1.5,7.5) H15(-0.5,7.5) H16(0.5,7.5) H17(1.5,7.5) H18(2.5,7.5) H19(3.5,7.5) H20(4.5,7.5) H21(5.5,7.5) H22(6.5,7.5) H23(7.5,7.5) H24(8.5,7.5) H25(9.5,7.5) H26(10.5,7.5) H27(11.5,7.5) H28(12.5,7.5) H29(13.5,7.5) H30(14.5,7.5) J1(-14.5,6.5) J2(-13.5,6.5) J3(-12.5,6.5) J4(-11.5,6.5) J5(-10.5,6.5) J6(-9.5,6.5) J7(-8.5,6.5) J8(-7.5,6.5) J9(-6.5,6.5) J10(-5.5,6.5) J11(-4.5,6.5) J12(-3.5,6.5) J13(-2.5,6.5) J14(-1.5,6.5) J15(-0.5,6.5) J16(0.5,6.5) J17(1.5,6.5) J18(2.5,6.5) J19(3.5,6.5) J20(4.5,6.5) J21(5.5,6.5) J22(6.5,6.5) J23(7.5,6.5) J24(8.5,6.5) J25(9.5,6.5) J26(10.5,6.5) J27(11.5,6.5) J28(12.5,6.5) J29(13.5,6.5) J30(14.5,6.5) K1(-14.5,5.5) K2(-13.5,5.5) K3(-12.5,5.5) K4(-11.5,5.5) K5(-10.5,5.5) K6(-9.5,5.5) K7(-8.5,5.5) K8(-7.5,5.5) K9(-6.5,5.5) K10(-5.5,5.5) K11(-4.5,5.5) K12(-3.5,5.5) K13(-2.5,5.5) K14(-1.5,5.5) K15(-0.5,5.5) K16(0.5,5.5) K17(1.5,5.5) K18(2.5,5.5) K19(3.5,5.5) K20(4.5,5.5) K21(5.5,5.5) K22(6.5,5.5) K23(7.5,5.5) K24(8.5,5.5) K25(9.5,5.5) K26(10.5,5.5) K27(11.5,5.5) K28(12.5,5.5) K29(13.5,5.5) K30(14.5,5.5) L1(-14.5,4.5) L2(-13.5,4.5) L3(-12.5,4.5) L4(-11.5,4.5) L5(-10.5,4.5) L6(-9.5,4.5) L7(-8.5,4.5) L8(-7.5,4.5) L9(-6.5,4.5) L10(-5.5,4.5) L11(-4.5,4.5) L12(-3.5,4.5) L13(-2.5,4.5) L14(-1.5,4.5) L15(-0.5,4.5) L16(0.5,4.5) L17(1.5,4.5) L18(2.5,4.5) L19(3.5,4.5) L20(4.5,4.5) L21(5.5,4.5) L22(6.5,4.5) L23(7.5,4.5) L24(8.5,4.5) L25(9.5,4.5) L26(10.5,4.5) L27(11.5,4.5) L28(12.5,4.5) L29(13.5,4.5) L30(14.5,4.5) M1(-14.5,3.5) M2(-13.5,3.5) M3(-12.5,3.5) M4(-11.5,3.5) M5(-10.5,3.5) M6(-9.5,3.5) M7(-8.5,3.5) M8(-7.5,3.5) M9(-6.5,3.5) M10(-5.5,3.5) M11(-4.5,3.5) M12(-3.5,3.5) M13(-2.5,3.5) M14(-1.5,3.5) M15(-0.5,3.5) M16(0.5,3.5) M17(1.5,3.5) M18(2.5,3.5) M19(3.5,3.5) M20(4.5,3.5) M21(5.5,3.5) M22(6.5,3.5) M23(7.5,3.5) M24(8.5,3.5) M25(9.5,3.5) M26(10.5,3.5) M27(11.5,3.5) M28(12.5,3.5) M29(13.5,3.5) M30(14.5,3.5) N1(-14.5,2.5) N2(-13.5,2.5) N3(-12.5,2.5) N4(-11.5,2.5) N5(-10.5,2.5) N6(-9.5,2.5) N7(-8.5,2.5) N8(-7.5,2.5) N9(-6.5,2.5) N10(-5.5,2.5) N11(-4.5,2.5) N12(-3.5,2.5) N13(-2.5,2.5) N14(-1.5,2.5) N15(-0.5,2.5) N16(0.5,2.5) N17(1.5,2.5) N18(2.5,2.5) N19(3.5,2.5) N20(4.5,2.5) N21(5.5,2.5) N22(6.5,2.5) N23(7.5,2.5) N24(8.5,2.5) N25(9.5,2.5) N26(10.5,2.5) N27(11.5,2.5) N28(12.5,2.5) N29(13.5,2.5) N30(14.5,2.5) P1(-14.5,1.5) P2(-13.5,1.5) P3(-12.5,1.5) P4(-11.5,1.5) P5(-10.5,1.5) P6(-9.5,1.5) P7(-8.5,1.5) P8(-7.5,1.5) P9(-6.5,1.5) P10(-5.5,1.5) P11(-4.5,1.5) P12(-3.5,1.5) P13(-2.5,1.5) P14(-1.5,1.5) P15(-0.5,1.5) P16(0.5,1.5) P17(1.5,1.5) P18(2.5,1.5) P19(3.5,1.5) P20(4.5,1.5) P21(5.5,1.5) P22(6.5,1.5) P23(7.5,1.5) P24(8.5,1.5) P25(9.5,1.5) P26(10.5,1.5) P27(11.5,1.5) P28(12.5,1.5) P29(13.5,1.5) P30(14.5,1.5) R1(-14.5,0.5) R2(-13.5,0.5) R3(-12.5,0.5) R4(-11.5,0.5) R5(-10.5,0.5) R6(-9.5,0.5) R7(-8.5,0.5) R8(-7.5,0.5) R9(-6.5,0.5) R10(-5.5,0.5) R11(-4.5,0.5) R12(-3.5,0.5) R13(-2.5,0.5) R14(-1.5,0.5) R15(-0.5,0.5) R16(0.5,0.5) R17(1.5,0.5) R18(2.5,0.5) R19(3.5,0.5) R20(4.5,0.5) R21(5.5,0.5) R22(6.5,0.5) R23(7.5,0.5) R24(8.5,0.5) R25(9.5,0.5) R26(10.5,0.5) R27(11.5,0.5) R28(12.5,0.5) R29(13.5,0.5) R30(14.5,0.5) T1(-14.5,-0.5) T2(-13.5,-0.5) T3(-12.5,-0.5) T4(-11.5,-0.5) T5(-10.5,-0.5) T6(-9.5,-0.5) T7(-8.5,-0.5) T8(-7.5,-0.5) T9(-6.5,-0.5) T10(-5.5,-0.5) T11(-4.5,-0.5) T12(-3.5,-0.5) T13(-2.5,-0.5) T14(-1.5,-0.5) T15(-0.5,-0.5) T16(0.5,-0.5) T17(1.5,-0.5) T18(2.5,-0.5) T19(3.5,-0.5) T20(4.5,-0.5) T21(5.5,-0.5) T22(6.5,-0.5) T23(7.5,-0.5) T24(8.5,-0.5) T25(9.5,-0.5) T26(10.5,-0.5) T27(11.5,-0.5) T28(12.5,-0.5) T29(13.5,-0.5) T30(14.5,-0.5) U1(-14.5,-1.5) U2(-13.5,-1.5) U3(-12.5,-1.5) U4(-11.5,-1.5) U5(-10.5,-1.5) U6(-9.5,-1.5) U7(-8.5,-1.5) U8(-7.5,-1.5) U9(-6.5,-1.5) U10(-5.5,-1.5) U11(-4.5,-1.5) U12(-3.5,-1.5) U13(-2.5,-1.5) U14(-1.5,-1.5) U15(-0.5,-1.5) U16(0.5,-1.5) U17(1.5,-1.5) U18(2.5,-1.5) U19(3.5,-1.5) U20(4.5,-1.5) U21(5.5,-1.5) U22(6.5,-1.5) U23(7.5,-1.5) U24(8.5,-1.5) U25(9.5,-1.5) U26(10.5,-1.5) U27(11.5,-1.5) U28(12.5,-1.5) U29(13.5,-1.5) U30(14.5,-1.5) V1(-14.5,-2.5) V2(-13.5,-2.5) V3(-12.5,-2.5) V4(-11.5,-2.5) V5(-10.5,-2.5) V6(-9.5,-2.5) V7(-8.5,-2.5) V8(-7.5,-2.5) V9(-6.5,-2.5) V10(-5.5,-2.5) V11(-4.5,-2.5) V12(-3.5,-2.5) V13(-2.5,-2.5) V14(-1.5,-2.5) V15(-0.5,-2.5) V16(0.5,-2.5) V17(1.5,-2.5) V18(2.5,-2.5) V19(3.5,-2.5) V20(4.5,-2.5) V21(5.5,-2.5) V22(6.5,-2.5) V23(7.5,-2.5) V24(8.5,-2.5) V25(9.5,-2.5) V26(10.5,-2.5) V27(11.5,-2.5) V28(12.5,-2.5) V29(13.5,-2.5) V30(14.5,-2.5) W1(-14.5,-3.5) W2(-13.5,-3.5) W3(-12.5,-3.5) W4(-11.5,-3.5) W5(-10.5,-3.5) W6(-9.5,-3.5) W7(-8.5,-3.5) W8(-7.5,-3.5) W9(-6.5,-3.5) W10(-5.5,-3.5) W11(-4.5,-3.5) W12(-3.5,-3.5) W13(-2.5,-3.5) W14(-1.5,-3.5) W15(-0.5,-3.5) W16(0.5,-3.5) W17(1.5,-3.5) W18(2.5,-3.5) W19(3.5,-3.5) W20(4.5,-3.5) W21(5.5,-3.5) W22(6.5,-3.5) W23(7.5,-3.5) W24(8.5,-3.5) W25(9.5,-3.5) W26(10.5,-3.5) W27(11.5,-3.5) W28(12.5,-3.5) W29(13.5,-3.5) W30(14.5,-3.5) Y1(-14.5,-4.5) Y2(-13.5,-4.5) Y3(-12.5,-4.5) Y4(-11.5,-4.5) Y5(-10.5,-4.5) Y6(-9.5,-4.5) Y7(-8.5,-4.5) Y8(-7.5,-4.5) Y9(-6.5,-4.5) Y10(-5.5,-4.5) Y11(-4.5,-4.5) Y12(-3.5,-4.5) Y13(-2.5,-4.5) Y14(-1.5,-4.5) Y15(-0.5,-4.5) Y16(0.5,-4.5) Y17(1.5,-4.5) Y18(2.5,-4.5) Y19(3.5,-4.5) Y20(4.5,-4.5) Y21(5.5,-4.5) Y22(6.5,-4.5) Y23(7.5,-4.5) Y24(8.5,-4.5) Y25(9.5,-4.5) Y26(10.5,-4.5) Y27(11.5,-4.5) Y28(12.5,-4.5) Y29(13.5,-4.5) Y30(14.5,-4.5)
  silkscreen extent -15.5,-15.5 15.5,15.5, body extent -15.5,-15.5 15.5,15.5, height 3.15
"PCIe x16 Board Edge Connector" [mm]
  rrect50% 0.7x3.2 smd far side mask+0.1: A1(0.65,4)
  rrect50% 0.7x4.3 smd far side mask+0.1: A2(1.65,3.45) A3(2.65,3.45) A4(3.65,3.45) A5(4.65,3.45) A6(5.65,3.45) A7(6.65,3.45) A8(7.65,3.45) A9(8.65,3.45) A10(9.65,3.45) A11(10.65,3.45) A12(13.65,3.45) A13(14.65,3.45) A14(15.65,3.45) A15(16.65,3.45) A16(17.65,3.45) A17(18.65,3.45) A18(19.65,3.45) A19(20.65,3.45) A20(21.65,3.45) A21(22.65,3.45) A22(23.65,3.45) A23(24.65,3.45) A24(25.65,3.45) A25(26.65,3.45) A26(27.65,3.45) A27(28.65,3.45) A28(29.65,3.45) A29(30.65,3.45) A30(31.65,3.45) A31(32.65,3.45) A32(33.65,3.45) A33(34.65,3.45) A34(35.65,3.45) A35(36.65,3.45) A36(37.65,3.45) A37(38.65,3.45) A38(39.65,3.45) A39(40.65,3.45) A40(41.65,3.45) A41(42.65,3.45) A42(43.65,3.45) A43(44.65,3.45) A44(45.65,3.45) A45(46.65,3.45) A46(47.65,3.45) A47(48.65,3.45) A48(49.65,3.45) A49(50.65,3.45) A50(51.65,3.45) A51(52.65,3.45) A52(53.65,3.45) A53(54.65,3.45) A54(55.65,3.45) A55(56.65,3.45) A56(57.65,3.45) A57(58.65,3.45) A58(59.65,3.45) A59(60.65,3.45) A60(61.65,3.45) A61(62.65,3.45) A62(63.65,3.45) A63(64.65,3.45) A64(65.65,3.45) A65(66.65,3.45) A66(67.65,3.45) A67(68.65,3.45) A68(69.65,3.45) A69(70.65,3.45) A70(71.65,3.45) A71(72.65,3.45) A72(73.65,3.45) A73(74.65,3.45) A74(75.65,3.45) A75(76.65,3.45) A76(77.65,3.45) A77(78.65,3.45) A78(79.65,3.45) A79(80.65,3.45) A80(81.65,3.45) A81(82.65,3.45) A82(83.65,3.45)
  rrect50% 0.7x4.3 smd mask+0.1: B1(0.65,3.45) B2(1.65,3.45) B3(2.65,3.45) B4(3.65,3.45) B5(4.65,3.45) B6(5.65,3.45) B7(6.65,3.45) B8(7.65,3.45) B9(8.65,3.45) B10(9.65,3.45) B11(10.65,3.45) B12(13.65,3.45) B13(14.65,3.45) B14(15.65,3.45) B15(16.65,3.45) B16(17.65,3.45) B17(18.65,3.45) B18(19.65,3.45) B19(20.65,3.45) B20(21.65,3.45) B21(22.65,3.45) B22(23.65,3.45) B23(24.65,3.45) B24(25.65,3.45) B25(26.65,3.45) B26(27.65,3.45) B27(28.65,3.45) B28(29.65,3.45) B29(30.65,3.45) B30(31.65,3.45) B31(32.65,3.45) B32(33.65,3.45) B33(34.65,3.45) B34(35.65,3.45) B35(36.65,3.45) B36(37.65,3.45) B37(38.65,3.45) B38(39.65,3.45) B39(40.65,3.45) B40(41.65,3.45) B41(42.65,3.45) B42(43.65,3.45) B43(44.65,3.45) B44(45.65,3.45) B45(46.65,3.45) B46(47.65,3.45) B47(48.65,3.45) B48(49.65,3.45) B49(50.65,3.45) B50(51.65,3.45) B51(52.65,3.45) B52(53.65,3.45) B53(54.65,3.45) B54(55.65,3.45) B55(56.65,3.45) B56(57.65,3.45) B57(58.65,3.45) B58(59.65,3.45) B59(60.65,3.45) B60(61.65,3.45) B61(62.65,3.45) B62(63.65,3.45) B63(64.65,3.45) B64(65.65,3.45) B65(66.65,3.45) B66(67.65,3.45) B67(68.65,3.45) B68(69.65,3.45) B69(70.65,3.45) B70(71.65,3.45) B71(72.65,3.45) B72(73.65,3.45) B73(74.65,3.45) B74(75.65,3.45) B75(76.65,3.45) B76(77.65,3.45) B77(78.65,3.45) B78(79.65,3.45) B79(80.65,3.45) B80(81.65,3.45) B82(83.65,3.45)
  rrect50% 0.7x3.2 smd mask+0.1: B81(82.65,4)